# EAGLE board Incredible Amberis (EAGLE 9.7.0)

Size 200.76 x 119.15 mm. Coordinates in mm from the lower left corner, seen from the top.
Outline: 0,0 200.76,0 200.76,119.15 0,119.15 0,0
Copper layers (1*16): Top 0.035mm / dielectric 1.5mm / Bottom 0.035mm
Design rules "default": minimum track width 6mil, minimum drill 0.35mm, track to track 6mil, track to pad 6mil, pad to pad 6mil, via to via 6mil, smd to smd 6mil, copper to edge 40mil, drill to drill 6mil, minimum pad ring 10mil, minimum via ring 8mil, stop-mask expansion 4mil, vias tented up to drill 0mil, thermal gap 10mil

## Footprints (pad centres in the part's own frame; a part is rotated, then mirrored left to right if it is on the bottom)
LEDRD254W60D565H860B_Y = drill 0.981 pad 1.581: 1 -1.27,0; 2 1.27,0
LEDRD254W60D565H860B_G = drill 0.981 pad 1.581: 1 -1.27,0; 2 1.27,0
LEDRD254W60D565H860B = drill 0.981 pad 1.581: 1 -1.27,0; 2 1.27,0
HC-SR04 = drill 1.016 long: 1 -3.81,0; 2 -1.27,0; 3 1.27,0; 4 3.81,0
MOTOR = drill 1.118 pad 3.15 octagon: + 2.54,0; - -2.54,0
RESAD1016W63L850D250B = drill 0.83 pad 1.43: 1 -5.08,0; 2 5.08,0
ARDUINO-UNO-R3-SHIELD = drill 1.016 pad 1.88: 3.3V 24.13,-2.54; 5V 24.13,0; A0 24.13,12.7; A1 24.13,15.24; A2 24.13,17.78; A3 24.13,20.32; A4 24.13,22.86; A5 24.13,25.4; AREF -24.13,-13.97; D2 -24.13,20.32; D3 -24.13,17.78; D4 -24.13,15.24; D5 -24.13,12.7; D6 -24.13,10.16; D7 -24.13,7.62; D8 -24.13,3.81; D9 -24.13,1.27; D10 -24.13,-1.27; D11 -24.13,-3.81; D12 -24.13,-6.35; D13 -24.13,-8.89; GND@0 24.13,2.54; GND@1 24.13,5.08; GND@2 -24.13,-11.43; IOREF 24.13,-7.62; NC 24.13,-10.16; RES 24.13,-5.08; RX -24.13,25.4; SCL -24.13,-19.05; SDA -24.13,-16.51; TX -24.13,22.86; VIN 24.13,7.62
LCD-I2C = drill 1.016 long: 1 -19.05,-5.08; 2 -19.05,-7.62; 3 -19.05,-10.16; 4 -19.05,-12.7

## Placement (x,y rotation side)
D1  YELLOW  [LEDRD254W60D565H860B_Y]  118.21,44.5 180 top
D2  GREEN  [LEDRD254W60D565H860B_G]  130.91,44.5 180 top
D3  RED  [LEDRD254W60D565H860B]  105.51,44.5 180 top
DIST1  DISTANCE-SENSOR-4PINHC-SR04  [HC-SR04]  177.58,67.48 270 top
M1  MOTOR_HDR  [MOTOR]  191.89,14.05 0 top
R1  1k  [RESAD1016W63L850D250B]  106.78,36.88 90 top
R2  1k  [RESAD1016W63L850D250B]  119.48,36.88 90 top
R3  1k  [RESAD1016W63L850D250B]  132.18,36.88 90 top
R4  100k  [RESAD1016W63L850D250B]  194.43,8.97 90 top
U1  ARDUINO-UNO-R3-SHIELD  [ARDUINO-UNO-R3-SHIELD]  47.88,67.71 270 top
U35  LCD-16X2-I2CSUNFOUNDER-IIC  [LCD-I2C]  120.57,111.61 0 top

## Library data of the parts
D1 = Tinkercad; CATEGORY: Opto-Electronic; SUB-CATEGORY: LED; VALUE: LED_YELLOW
D2 = Tinkercad; CATEGORY: Opto-Electronic; SUB-CATEGORY: LED; VALUE: LED_GREEN
D3 = Tinkercad; CATEGORY: Opto-Electronic; SUB-CATEGORY: LED; VALUE: LED_RED
DIST1 M1 R1-R4 U1 U35 = Tinkercad

## Nets
D1_A: D1.1 R2.2
D2_A: D2.1 R3.2
D3_A: D3.1 R1.2
M1_+: M1.+ R4.2
U1_5V: DIST1.1 U1.5V U35.2
U1_D2: R1.1 U1.D2
U1_D3: R2.1 U1.D3
U1_D4: R3.1 U1.D4
U1_D5: R4.1 U1.D5
U1_D9: DIST1.3 U1.D9
U1_D10: DIST1.2 U1.D10
U1_GND: D1.2 D2.2 D3.2 DIST1.4 M1.- U1.GND@0 U1.GND@1 U1.GND@2 U35.1
U1_SCL: U1.SCL U35.4
U1_SDA: U1.SDA U35.3

## Tracks (layer width: path | path; a pad name or v marks a point on that pad's centre or on a via)
D1_A  (1 unrouted)
D2_A  (1 unrouted)
D3_A  (1 unrouted)
M1_+  (1 unrouted)
U1_5V  (2 unrouted)
U1_D2  (1 unrouted)
U1_D3  (1 unrouted)
U1_D4  (1 unrouted)
U1_D5  (1 unrouted)
U1_D9  (1 unrouted)
U1_D10  (1 unrouted)
U1_GND  (8 unrouted)
U1_SCL  (1 unrouted)
U1_SDA  (1 unrouted)